# EAGLE board Mux_Board-v0-0-1 (EAGLE 5.06)
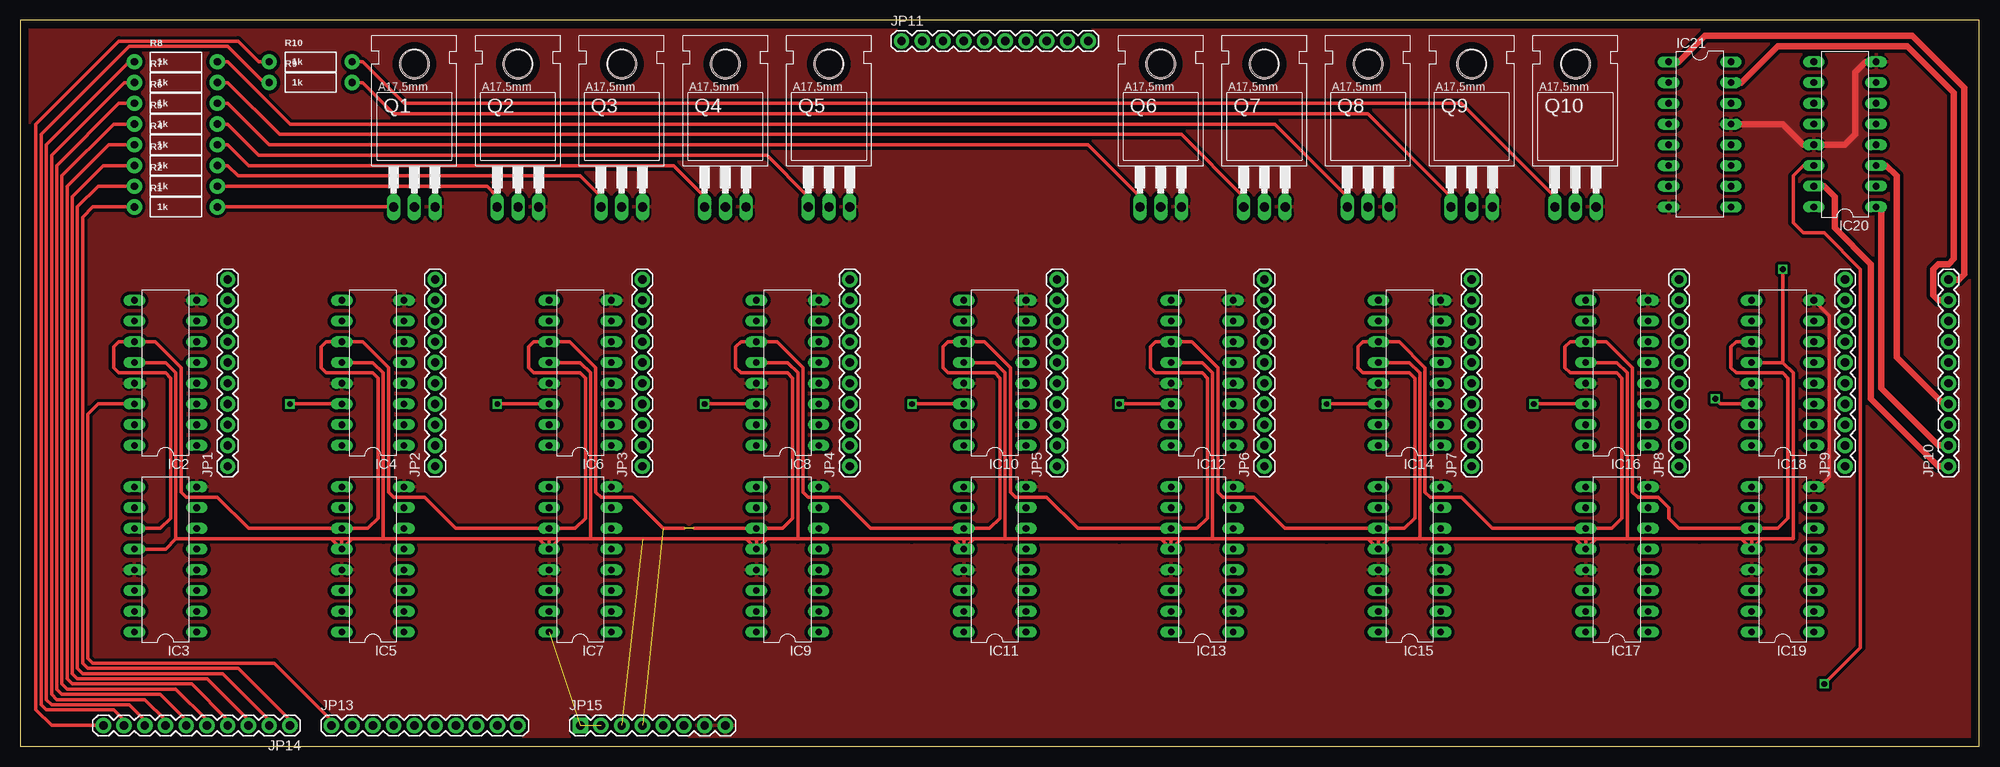
[diagram p0: board, top side]
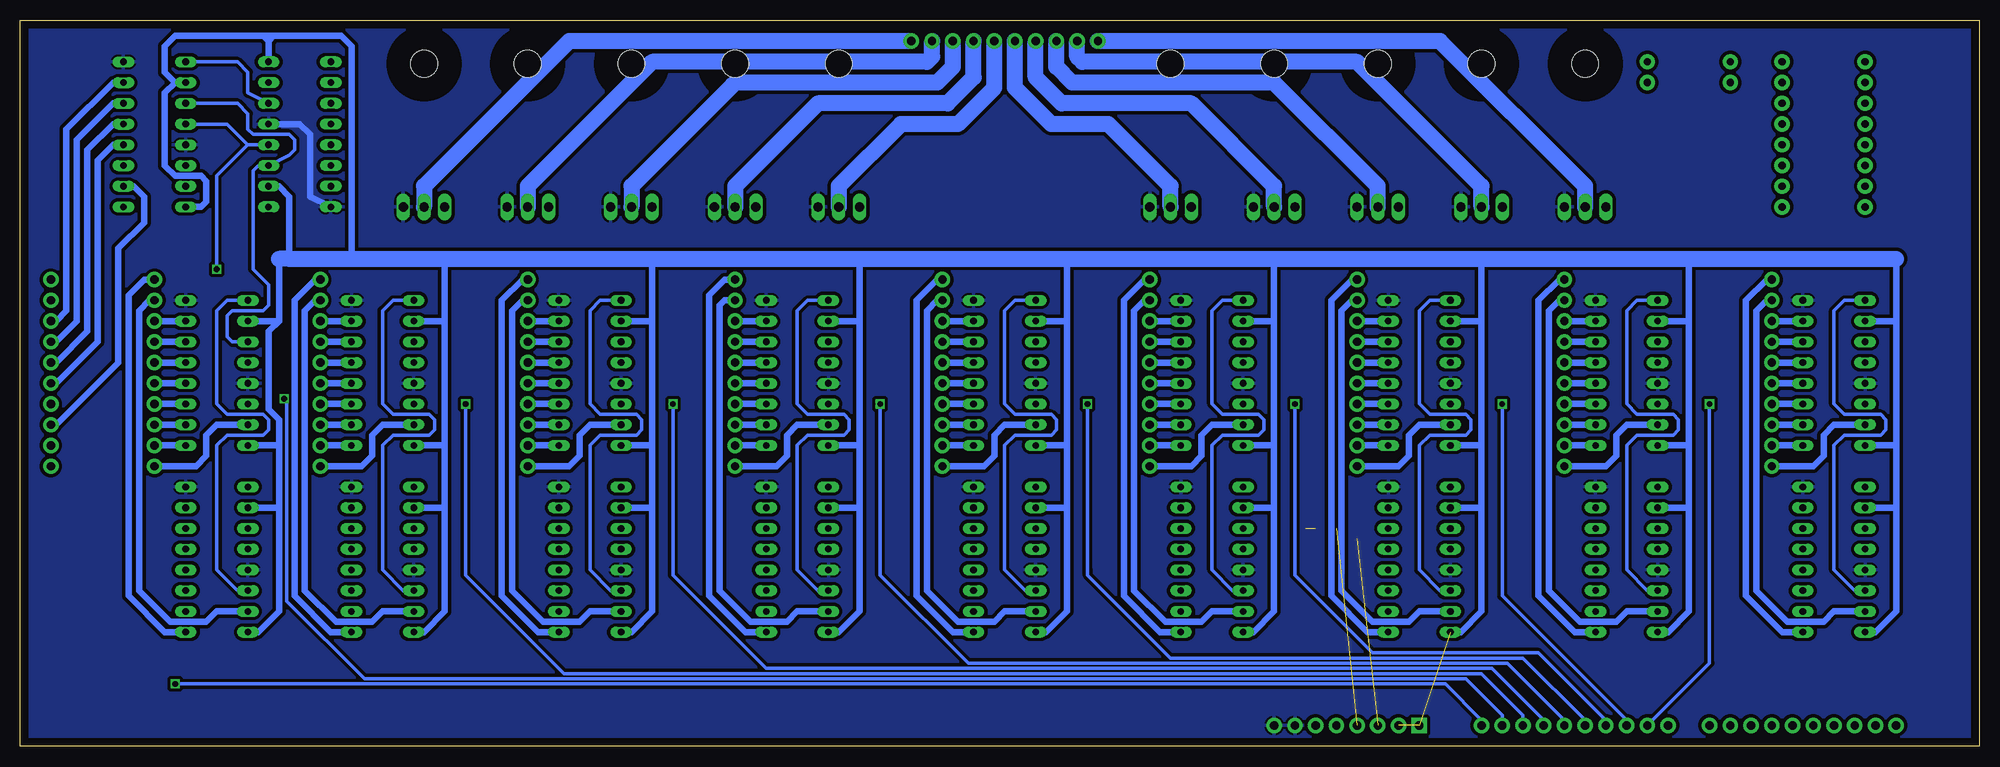
[diagram p1: board, bottom side, seen from below]

Size 239.95 x 88.89 mm. Coordinates in mm from the lower left corner, seen from the top.
Outline: 0,0 239.95,0 239.95,88.89 0,88.89 0,0
Copper layers (1*16): Top 0.035mm / dielectric 1.5mm / Bottom 0.035mm
Design rules "default": minimum track width 10mil, minimum drill 24mil, track to track 8mil, track to pad 8mil, pad to pad 8mil, via to via 8mil, smd to smd 8mil, copper to edge 40mil, drill to drill 8mil, minimum pad ring 10mil, minimum via ring 8mil, stop-mask expansion 4mil, vias tented up to drill 0mil, thermal gap 10mil

## Footprints (pad centres in the part's own frame; a part is rotated, then mirrored left to right if it is on the bottom)
DIL16 = drill 0.813 long: 1 -8.89,-3.81; 2 -6.35,-3.81; 3 -3.81,-3.81; 4 -1.27,-3.81; 5 1.27,-3.81; 6 3.81,-3.81; 7 6.35,-3.81; 8 8.89,-3.81; 9 8.89,3.81; 10 6.35,3.81; 11 3.81,3.81; 12 1.27,3.81; 13 -1.27,3.81; 14 -3.81,3.81; 15 -6.35,3.81; 16 -8.89,3.81
1X10 = drill 1.016 pad 1.88 round: 1 0,0; 2 2.54,0; 3 5.08,0; 4 7.62,0; 5 10.16,0; 6 12.7,0; 7 15.24,0; 8 17.78,0; 9 20.32,0; 10 22.86,0
1X08 = drill 1.016 pad 1.88 square: 1 0,0 | drill 1.016 pad 1.88 round: 2 2.54,0; 3 5.08,0; 4 7.62,0; 5 10.16,0; 6 12.7,0; 7 15.24,0; 8 17.78,0
TO220 = drill 1.118 long: 1 -2.54,-6.35; 2 0,-6.35; 3 2.54,-6.35 | hole 3.302: 0,11.176
AXIAL-0.4 = drill 0.9 pad 1.88 round: P$1 -5.08,0; P$2 5.08,0

## Placement (x,y rotation side)
IC2  74LS595N  [DIL16]  17.78,45.72 90 top
IC3  74LS595N  [DIL16]  17.78,22.86 90 top
IC4  74LS595N  [DIL16]  43.18,45.72 90 top
IC5  74LS595N  [DIL16]  43.18,22.86 90 top
IC6  74LS595N  [DIL16]  68.58,45.72 90 top
IC7  74LS595N  [DIL16]  68.58,22.86 90 top
IC8  74LS595N  [DIL16]  93.98,45.72 90 top
IC9  74LS595N  [DIL16]  93.98,22.86 90 top
IC10  74LS595N  [DIL16]  119.38,45.72 90 top
IC11  74LS595N  [DIL16]  119.38,22.86 90 top
IC12  74LS595N  [DIL16]  144.78,45.72 90 top
IC13  74LS595N  [DIL16]  144.78,22.86 90 top
IC14  74LS595N  [DIL16]  170.18,45.72 90 top
IC15  74LS595N  [DIL16]  170.18,22.86 90 top
IC16  74LS595N  [DIL16]  195.58,45.72 90 top
IC17  74LS595N  [DIL16]  195.58,22.86 90 top
IC18  74LS595N  [DIL16]  215.9,45.72 90 top
IC19  74LS595N  [DIL16]  215.9,22.86 90 top
IC20  74LS595N  [DIL16]  223.52,74.93 90 top
IC21  74LS595N  [DIL16]  205.74,74.93 270 top
JP1  M10"  [1X10]  25.4,34.29 90 top
JP2  M10"  [1X10]  50.8,34.29 90 top
JP3  M10"  [1X10]  76.2,34.29 90 top
JP4  M10"  [1X10]  101.6,34.29 90 top
JP5  M10"  [1X10]  127,34.29 90 top
JP6  M10"  [1X10]  152.4,34.29 90 top
JP7  M10"  [1X10]  177.8,34.29 90 top
JP8  M10"  [1X10]  203.2,34.29 90 top
JP9  M10"  [1X10]  223.52,34.29 90 top
JP10  M10"  [1X10]  236.22,34.29 90 top
JP11  M10"  [1X10]  107.95,86.36 0 top
JP13  M10"  [1X10]  38.1,2.54 0 top
JP14  M10"  [1X10]  33.02,2.54 180 top
JP15  3  [1X08]  68.58,2.54 0 top
Q1  BD243  [TO220]  48.26,72.39 0 top
Q2  BD243  [TO220]  60.96,72.39 0 top
Q3  BD243  [TO220]  73.66,72.39 0 top
Q4  BD243  [TO220]  86.36,72.39 0 top
Q5  BD243  [TO220]  99.06,72.39 0 top
Q6  BD243  [TO220]  139.7,72.39 0 top
Q7  BD243  [TO220]  152.4,72.39 0 top
Q8  BD243  [TO220]  165.1,72.39 0 top
Q9  BD243  [TO220]  177.8,72.39 0 top
Q10  BD243  [TO220]  190.5,72.39 0 top
R1  1k  [AXIAL-0.4]  19.05,66.04 0 top
R2  1k  [AXIAL-0.4]  19.05,68.58 0 top
R3  1k  [AXIAL-0.4]  19.05,71.12 0 top
R4  1k  [AXIAL-0.4]  19.05,73.66 0 top
R5  1k  [AXIAL-0.4]  19.05,76.2 0 top
R6  1k  [AXIAL-0.4]  19.05,78.74 0 top
R7  1k  [AXIAL-0.4]  19.05,81.28 0 top
R8  1k  [AXIAL-0.4]  19.05,83.82 0 top
R9  1k  [AXIAL-0.4]  35.56,81.28 0 top
R10  1k  [AXIAL-0.4]  35.56,83.82 0 top

## Library data of the parts
IC2-IC21 JP1-JP11 JP13-JP15 R1-R10 = SparkFun
Q1-Q10 = transistor-npn

## Nets
C1: IC2.14 JP13.1
C2: IC4.14 JP13.2
C3: IC6.14 JP13.3
C4: IC8.14 JP13.4
C5: IC10.14 JP13.5
C6: IC12.14 JP13.6
C7: IC14.14 JP13.7
C8: IC16.14 JP13.8
C9: IC18.14 JP13.9
C10: IC20.14 JP13.10
GND: IC2.8 IC2.13 IC3.8 IC3.13 IC4.8 IC4.13 IC5.8 IC5.13 IC6.8 IC6.13 IC7.8 IC7.13 IC8.8 IC8.13 IC9.8 IC9.13 IC10.8 IC10.13 IC11.8 IC11.13 IC12.8 IC12.13 IC13.8 IC13.13 IC14.8 IC14.13 IC15.8 IC15.13 IC16.8 IC16.13 IC17.8 IC17.13 IC18.8 IC18.13 IC19.8 IC19.13 IC20.8 IC20.13 IC21.8 IC21.13 JP15.7 JP15.8 Q1.3 Q2.3 Q3.3 Q4.3 Q5.3 Q6.3 Q7.3 Q8.3 Q9.3 Q10.3
L1: JP14.1 R1.P$1
L2: JP14.2 R2.P$1
L3: JP14.3 R3.P$1
L4: JP14.4 R4.P$1
L5: JP14.5 R5.P$1
L6: JP14.6 R6.P$1
L7: JP14.7 R7.P$1
L8: JP14.8 R8.P$1
L9: JP14.9 R9.P$1
L10: JP14.10 R10.P$1
N$3: Q1.1 R1.P$2
N$4: JP11.1 Q1.2
N$5: Q2.1 R2.P$2
N$6: IC2.9 IC3.14
N$8: IC2.15 JP1.1
N$9: IC2.1 JP1.2
N$10: IC2.2 JP1.3
N$11: IC2.3 JP1.4
N$12: IC2.4 JP1.5
N$13: IC2.5 JP1.6
N$14: IC2.6 JP1.7
N$15: IC2.7 JP1.8
N$16: IC3.15 JP1.9
N$17: IC3.1 JP1.10
N$18: Q3.1 R3.P$2
N$19: IC4.15 JP2.1
N$20: IC4.1 JP2.2
N$21: IC4.2 JP2.3
N$22: IC4.3 JP2.4
N$23: IC4.4 JP2.5
N$24: IC4.5 JP2.6
N$25: IC4.6 JP2.7
N$26: IC4.7 JP2.8
N$27: IC4.9 IC5.14
N$28: IC5.15 JP2.9
N$29: IC5.1 JP2.10
N$30: Q4.1 R4.P$2
N$31: IC7.15 JP3.9
N$32: IC6.15 JP3.1
N$33: IC6.1 JP3.2
N$34: IC6.2 JP3.3
N$35: IC6.3 JP3.4
N$36: IC6.4 JP3.5
N$37: IC6.5 JP3.6
N$38: IC6.6 JP3.7
N$39: IC6.7 JP3.8
N$40: IC7.1 JP3.10
N$41: IC6.9 IC7.14
N$42: Q5.1 R5.P$2
N$43: JP11.10 Q10.2
N$44: IC8.9 IC9.14
N$45: IC8.15 JP4.1
N$46: IC8.1 JP4.2
N$47: IC8.2 JP4.3
N$48: IC8.3 JP4.4
N$49: IC8.4 JP4.5
N$50: IC8.5 JP4.6
N$51: IC8.6 JP4.7
N$52: IC8.7 JP4.8
N$53: IC9.15 JP4.9
N$54: IC9.1 JP4.10
N$55: Q10.1 R10.P$2
N$56: IC10.15 JP5.1
N$57: IC10.1 JP5.2
N$58: IC10.2 JP5.3
N$59: IC10.3 JP5.4
N$60: IC10.4 JP5.5
N$61: IC10.5 JP5.6
N$62: IC10.6 JP5.7
N$63: IC10.7 JP5.8
N$64: IC10.9 IC11.14
N$65: IC11.15 JP5.9
N$66: IC11.1 JP5.10
N$67: Q9.1 R9.P$2
N$68: Q8.1 R8.P$2
N$69: IC12.15 JP6.1
N$70: IC12.1 JP6.2
N$71: IC12.2 JP6.3
N$72: IC12.3 JP6.4
N$73: IC12.4 JP6.5
N$74: IC12.5 JP6.6
N$75: IC12.6 JP6.7
N$76: IC12.7 JP6.8
N$77: IC12.9 IC13.14
N$78: IC13.15 JP6.9
N$79: IC13.1 JP6.10
N$80: Q7.1 R7.P$2
N$81: JP11.2 Q2.2
N$82: IC14.9 IC15.14
N$83: IC14.15 JP7.1
N$84: IC14.1 JP7.2
N$85: IC14.2 JP7.3
N$86: IC14.3 JP7.4
N$87: IC14.4 JP7.5
N$88: IC14.5 JP7.6
N$89: IC14.6 JP7.7
N$90: IC14.7 JP7.8
N$91: IC15.15 JP7.9
N$92: IC15.1 JP7.10
N$93: JP11.3 Q3.2
N$94: IC16.15 JP8.1
N$95: IC16.1 JP8.2
N$96: IC16.2 JP8.3
N$97: IC16.3 JP8.4
N$98: IC16.4 JP8.5
N$99: IC16.5 JP8.6
N$100: IC16.6 JP8.7
N$101: IC16.7 JP8.8
N$102: IC16.9 IC17.14
N$103: IC17.15 JP8.9
N$104: IC17.1 JP8.10
N$105: JP11.4 Q4.2
N$106: JP11.5 Q5.2
N$107: IC18.15 JP9.1
N$108: IC18.1 JP9.2
N$109: IC18.2 JP9.3
N$110: IC18.3 JP9.4
N$111: IC18.4 JP9.5
N$112: IC18.5 JP9.6
N$113: IC18.6 JP9.7
N$114: IC18.7 JP9.8
N$115: IC18.9 IC19.14
N$116: IC19.15 JP9.9
N$117: IC19.1 JP9.10
N$118: JP11.6 Q6.2
N$119: JP11.9 Q9.2
N$120: IC20.9 IC21.14
N$121: IC20.15 JP10.1
N$122: IC20.1 JP10.2
N$123: IC20.2 JP10.3
N$124: IC20.3 JP10.4
N$125: IC20.4 JP10.5
N$126: IC20.5 JP10.6
N$127: IC20.6 JP10.7
N$128: IC20.7 JP10.8
N$129: IC21.15 JP10.9
N$130: IC21.1 JP10.10
N$131: JP11.7 Q7.2
N$132: JP11.8 Q8.2
N$133: Q6.1 R6.P$2
RCK: IC2.12 IC3.12 IC4.12 IC5.12 IC6.12 IC7.12 IC8.12 IC9.12 IC10.12 IC11.12 IC12.12 IC13.12 IC14.12 IC15.12 IC16.12 IC17.12 IC18.12 IC19.12 IC20.12 IC21.12 JP15.3
SCK: IC2.11 IC3.11 IC4.11 IC5.11 IC6.11 IC7.11 IC8.11 IC9.11 IC10.11 IC11.11 IC12.11 IC13.11 IC14.11 IC15.11 IC16.11 IC17.11 IC18.11 IC19.11 IC20.11 IC21.11 JP15.4
VCC: IC2.10 IC2.16 IC3.10 IC3.16 IC4.10 IC4.16 IC5.10 IC5.16 IC6.10 IC6.16 IC7.10 IC7.16 IC8.10 IC8.16 IC9.10 IC9.16 IC10.10 IC10.16 IC11.10 IC11.16 IC12.10 IC12.16 IC13.10 IC13.16 IC14.10 IC14.16 IC15.10 IC15.16 IC16.10 IC16.16 IC17.10 IC17.16 IC18.10 IC18.16 IC19.10 IC19.16 IC20.10 IC20.16 IC21.10 IC21.16 JP15.1 JP15.2

## Tracks (layer width: path | path; a pad name or v marks a point on that pad's centre or on a via)
C1
  Top 0.406: IC2.14 9.53,41.91 8.26,40.64 8.26,10.79 8.89,10.16 31.11,10.16 38.1,3.17 JP13.1
C2  (via drill 0.7)
  Top 0.406: v33.02,41.91 IC4.14
  Bottom 0.406: v33.02,41.91 33.02,10.16 JP13.2
C3  (via drill 0.7)
  Top 0.406: v58.42,41.91 IC6.14
  Bottom 0.406: v58.42,41.91 58.42,18.41 43.18,3.17 JP13.3
C4  (via drill 0.7)
  Top 0.406: v83.82,41.91 IC8.14
  Bottom 0.406: v83.82,41.91 83.82,20.95 74.3,11.43 53.98,11.43 45.72,3.17 JP13.4
C5  (via drill 0.7)
  Top 0.406: v109.22,41.91 IC10.14
  Bottom 0.406: JP13.5 48.26,3.17 55.88,10.79 99.06,10.79 109.22,20.95 109.22,21.59 v109.22,41.91
C6  (via drill 0.7)
  Top 0.406: v134.62,41.91 IC12.14
  Bottom 0.406: v134.62,41.91 134.62,20.95 123.83,10.16 57.78,10.16 50.8,3.17 JP13.6
C7  (via drill 0.7)
  Top 0.406: v160.02,41.91 IC14.14
  Bottom 0.406: v160.02,41.91 160.02,20.95 148.59,9.53 59.69,9.53 53.34,3.17 JP13.7
C8  (via drill 0.7)
  Top 0.406: v185.42,41.91 IC16.14
  Bottom 0.406: v185.42,41.91 185.42,20.95 173.35,8.89 60.96,8.89 55.88,3.81 JP13.8
C9  (via drill 0.7)
  Top 0.406: IC18.14 208.28,41.91 v207.65,42.55
  Bottom 0.406: v207.65,42.55 207.33,42.23 207.33,17.78 197.8,8.25 62.87,8.25 58.42,3.81 JP13.9
C10  (via drill 0.7)
  Top 0.406: IC20.14 218.44,71.12 217.17,69.85 217.17,64.13 218.44,62.87 220.98,62.87 225.43,58.42 225.43,12.06 v220.98,7.62
  Bottom 0.406: v220.98,7.62 65.41,7.62 60.96,3.17 JP13.10
GND
  Top 0.406: IC19.8 220.34,31.75 221.62,33.02 221.62,52.7 IC18.8
  Top 0.813: IC20.8 226.06,83.82 224.79,82.55 224.79,74.93 223.52,73.66 IC20.13 218.44,73.66 215.9,76.2 IC21.13
  Bottom 0.813: IC21.13 205.74,76.2 204.47,74.93 204.47,67.31 IC21.8
  pour Top (isolate 0.406): 0,0 0,88.9 240.03,88.9 240.03,0
  pour Bottom (isolate 0.406, rank 2): 0,0 0,88.9 240.03,88.9 240.03,0
L1
  Top 0.406: R1.P$1 8.89,66.04 7.62,64.77 7.62,10.16 8.26,9.53 26.67,9.53 33.02,3.17 JP14.1
L2
  Top 0.406: R2.P$1 9.53,68.58 6.99,66.04 6.99,9.53 7.62,8.89 24.77,8.89 30.48,3.17 JP14.2
L3
  Top 0.406: R3.P$1 10.16,71.12 6.35,67.31 6.35,8.89 6.99,8.25 22.86,8.25 27.94,3.17 JP14.3
L4
  Top 0.406: R4.P$1 10.79,73.66 5.71,68.58 5.71,8.25 6.35,7.62 20.95,7.62 25.4,3.17 JP14.4
L5
  Top 0.406: R5.P$1 11.43,76.2 5.08,69.85 5.08,7.62 5.71,6.98 19.05,6.98 22.86,3.17 JP14.5
L6
  Top 0.406: R6.P$1 12.06,78.74 4.45,71.12 4.45,6.98 5.08,6.35 17.14,6.35 20.32,3.17 JP14.6
L7
  Top 0.406: R7.P$1 12.7,81.28 3.81,72.39 3.81,6.35 4.45,5.71 15.24,5.71 17.78,3.17 JP14.7
L8
  Top 0.406: R8.P$1 13.34,83.82 3.17,73.66 3.17,5.71 3.81,5.08 13.34,5.08 15.24,3.17 JP14.8
L9
  Top 0.406: R9.P$1 29.84,81.28 25.4,85.72 13.34,85.72 2.54,74.93 2.54,5.08 3.17,4.44 11.43,4.44 12.7,3.17 JP14.9
L10
  Top 0.406: R10.P$1 29.21,83.82 26.67,86.36 12.06,86.36 1.91,76.2 1.91,4.44 3.81,2.54 JP14.10
N$3
  Top 0.406: R1.P$2 Q1.1
N$4
  Bottom 1.93: Q1.2 48.26,68.58 66.04,86.36 JP11.1
N$5
  Top 0.406: R2.P$2 57.15,68.58 58.42,67.31 Q2.1
N$6
  Bottom 0.406: IC2.9 16.51,54.61 17.78,53.34 17.78,41.91 16.51,40.64 12.06,40.64 11.43,40 11.43,38.73 12.06,38.1 16.51,38.1 17.78,36.83 17.78,21.59 15.24,19.05 IC3.14
N$8
  Bottom 0.813: IC2.15 17.78,39.37 19.05,38.1 19.05,35.56 20.32,34.29 JP1.1
N$9
  Bottom 0.813: IC2.1 JP1.2
N$10
  Bottom 0.813: IC2.2 JP1.3
N$11
  Bottom 0.813: IC2.3 JP1.4
N$12
  Bottom 0.813: IC2.4 JP1.5
N$13
  Bottom 0.813: IC2.5 JP1.6
N$14
  Bottom 0.813: IC2.6 JP1.7
N$15
  Bottom 0.813: IC2.7 JP1.8
N$16
  Bottom 0.813: IC3.15 17.78,16.51 19.05,15.24 23.5,15.24 27.3,19.05 27.3,53.34 26.04,54.61 JP1.9
N$17
  Bottom 0.813: JP1.10 26.04,57.15 28.57,54.61 28.57,18.41 24.13,13.97 IC3.1
N$18
  Top 0.406: R3.P$2 25.4,71.12 26.67,69.85 68.58,69.85 71.12,67.31 Q3.1
N$19
  Bottom 0.813: IC4.15 43.18,39.37 44.45,38.1 44.45,35.56 45.72,34.29 JP2.1
N$20
  Bottom 0.813: IC4.1 JP2.2
N$21
  Bottom 0.813: IC4.2 JP2.3
N$22
  Bottom 0.813: IC4.3 JP2.4
N$23
  Bottom 0.813: IC4.4 JP2.5
N$24
  Bottom 0.813: IC4.5 JP2.6
N$25
  Bottom 0.813: IC4.6 JP2.7
N$26
  Bottom 0.813: IC4.7 JP2.8
N$27
  Bottom 0.406: IC4.9 41.91,54.61 43.18,53.34 43.18,41.91 41.91,40.64 37.47,40.64 36.83,40 36.83,38.73 37.47,38.1 41.91,38.1 43.18,36.83 43.18,21.59 40.64,19.05 IC5.14
N$28
  Bottom 0.813: IC5.15 43.18,16.51 44.45,15.24 48.9,15.24 52.7,19.05 52.7,53.34 51.44,54.61 JP2.9
N$29
  Bottom 0.813: IC5.1 49.53,13.97 53.98,18.41 53.98,54.61 51.44,57.15 JP2.10
N$30
  Top 0.406: R4.P$2 25.4,73.66 27.94,71.12 80.01,71.12 83.82,67.31 Q4.1
N$31
  Bottom 0.813: IC7.15 68.58,16.51 69.85,15.24 74.3,15.24 78.11,19.05 78.11,53.34 76.83,54.61 JP3.9
N$32
  Bottom 0.813: IC6.15 68.58,39.37 69.85,38.1 69.85,35.56 71.12,34.29 JP3.1
N$33
  Bottom 0.813: IC6.1 JP3.2
N$34
  Bottom 0.813: IC6.2 JP3.3
N$35
  Bottom 0.813: IC6.3 JP3.4
N$36
  Bottom 0.813: IC6.4 JP3.5
N$37
  Bottom 0.813: IC6.5 JP3.6
N$38
  Bottom 0.813: IC6.6 JP3.7
N$39
  Bottom 0.813: IC6.7 JP3.8
N$40
  Bottom 0.813: JP3.10 76.83,57.15 79.38,54.61 79.38,18.41 74.93,13.97 IC7.1
N$41
  Bottom 0.406: IC6.9 67.31,54.61 68.58,53.34 68.58,41.91 67.31,40.64 62.87,40.64 62.23,40 62.23,38.73 62.87,38.1 67.31,38.1 68.58,36.83 68.58,21.59 66.04,19.05 IC7.14
N$42
  Top 0.406: R5.P$2 25.4,76.2 29.21,72.39 91.44,72.39 96.52,67.31 Q5.1
N$43
  Bottom 1.93: Q10.2 190.5,68.58 172.72,86.36 JP11.10
N$44
  Bottom 0.406: IC8.9 92.71,54.61 93.98,53.34 93.98,41.91 92.71,40.64 88.27,40.64 87.63,40 87.63,38.73 88.27,38.1 92.71,38.1 93.98,36.83 93.98,21.59 91.44,19.05 IC9.14
N$45
  Bottom 0.813: IC8.15 93.98,39.37 95.25,38.1 95.25,35.56 96.52,34.29 JP4.1
N$46
  Bottom 0.813: IC8.1 JP4.2
N$47
  Bottom 0.813: IC8.2 JP4.3
N$48
  Bottom 0.813: IC8.3 JP4.4
N$49
  Bottom 0.813: IC8.4 JP4.5
N$50
  Bottom 0.813: IC8.5 JP4.6
N$51
  Bottom 0.813: IC8.6 JP4.7
N$52
  Bottom 0.813: IC8.7 JP4.8
N$53
  Bottom 0.813: IC9.15 93.98,16.51 95.25,15.24 99.69,15.24 103.5,19.05 103.5,53.34 102.23,54.61 JP4.9
N$54
  Bottom 0.813: 100.33,13.97 IC9.1 100.33,13.97 | 100.33,13.97 104.78,18.41 | 104.78,18.41 104.78,54.61 | 104.78,54.61 102.23,57.15 | 102.23,57.15 JP4.10 | 104.78,18.41 104.78,54.61 | 104.78,54.61 102.23,57.15
N$55
  Top 0.406: R10.P$2 41.91,83.82 46.99,78.74 176.53,78.74 187.96,67.31 Q10.1
N$56
  Bottom 0.813: IC10.15 119.38,39.37 120.65,38.1 120.65,35.56 121.92,34.29 JP5.1
N$57
  Bottom 0.813: IC10.1 JP5.2
N$58
  Bottom 0.813: IC10.2 JP5.3
N$59
  Bottom 0.813: IC10.3 JP5.4
N$60
  Bottom 0.813: IC10.4 JP5.5
N$61
  Bottom 0.813: IC10.5 JP5.6
N$62
  Bottom 0.813: IC10.6 JP5.7
N$63
  Bottom 0.813: IC10.7 JP5.8
N$64
  Bottom 0.406: IC10.9 118.11,54.61 119.38,53.34 119.38,41.91 118.11,40.64 113.67,40.64 113.03,40 113.03,38.73 113.67,38.1 118.11,38.1 119.38,36.83 119.38,21.59 116.84,19.05 IC11.14
N$65
  Bottom 0.813: IC11.15 119.38,16.51 120.65,15.24 125.09,15.24 128.91,19.05 128.91,53.34 127.64,54.61 JP5.9
N$66
  Bottom 0.813: JP5.10 127.64,57.15 130.18,54.61 130.18,18.41 125.73,13.97 IC11.1
N$67
  Top 0.406: R9.P$2 41.91,81.28 45.72,77.47 165.1,77.47 175.26,67.31 Q9.1
N$68
  Top 0.406: R8.P$2 25.4,83.82 33.02,76.2 153.67,76.2 162.56,67.31 Q8.1
N$69
  Bottom 0.813: IC12.15 144.78,39.37 146.05,38.1 146.05,35.56 147.32,34.29 JP6.1
N$70
  Bottom 0.813: IC12.1 JP6.2
N$71
  Bottom 0.813: IC12.2 JP6.3
N$72
  Bottom 0.813: IC12.3 JP6.4
N$73
  Bottom 0.813: IC12.4 JP6.5
N$74
  Bottom 0.813: IC12.5 JP6.6
N$75
  Bottom 0.813: IC12.6 JP6.7
N$76
  Bottom 0.813: IC12.7 JP6.8
N$77
  Bottom 0.406: IC12.9 143.51,54.61 144.78,53.34 144.78,41.91 143.51,40.64 139.06,40.64 138.43,40 138.43,38.73 139.06,38.1 143.51,38.1 144.78,36.83 144.78,21.59 142.24,19.05 IC13.14
N$78
  Bottom 0.813: IC13.15 144.78,16.51 146.05,15.24 150.5,15.24 154.31,19.05 154.31,53.98 153.67,54.61 JP6.9
N$79
  Bottom 0.813: JP6.10 153.67,57.15 155.57,55.24 155.57,18.41 151.13,13.97 IC13.1
N$80
  Top 0.406: R7.P$2 25.4,81.28 31.75,74.93 142.24,74.93 149.86,67.31 Q7.1
N$81
  Bottom 1.93: JP11.2 110.49,84.46 109.86,83.82 76.2,83.82 60.96,68.58 Q2.2
N$82
  Bottom 0.406: IC14.9 168.91,54.61 170.18,53.34 170.18,41.91 168.91,40.64 164.47,40.64 163.83,40 163.83,38.73 164.47,38.1 168.91,38.1 170.18,36.83 170.18,21.59 167.64,19.05 IC15.14
N$83
  Bottom 0.813: IC14.15 170.18,39.37 171.45,38.1 171.45,35.56 172.72,34.29 JP7.1
N$84
  Bottom 0.813: IC14.1 JP7.2
N$85
  Bottom 0.813: IC14.2 JP7.3
N$86
  Bottom 0.813: IC14.3 JP7.4
N$87
  Bottom 0.813: IC14.4 JP7.5
N$88
  Bottom 0.813: IC14.5 JP7.6
N$89
  Bottom 0.813: IC14.6 JP7.7
N$90
  Bottom 0.813: IC14.7 JP7.8
N$91
  Bottom 0.813: IC15.15 170.18,16.51 171.45,15.24 175.9,15.24 179.71,19.05 179.71,53.34 178.44,54.61 JP7.9
N$92
  Bottom 0.813: IC15.1 176.53,13.97 180.97,18.41 180.97,54.61 178.44,57.15 JP7.10
N$93
  Bottom 1.93: JP11.3 113.03,83.19 111.12,81.28 86.36,81.28 73.66,68.58 Q3.2
N$94
  Bottom 0.813: IC16.15 195.58,39.37 196.85,38.1 196.85,35.56 198.12,34.29 JP8.1
N$95
  Bottom 0.813: IC16.1 JP8.2
N$96
  Bottom 0.813: IC16.2 JP8.3
N$97
  Bottom 0.813: IC16.3 JP8.4
N$98
  Bottom 0.813: IC16.4 JP8.5
N$99
  Bottom 0.813: IC16.5 JP8.6
N$100
  Bottom 0.813: IC16.6 JP8.7
N$101
  Bottom 0.813: IC16.7 JP8.8
N$102
  Bottom 0.406: IC16.9 194.31,54.61 195.58,53.34 195.58,41.91 194.31,40.64 189.87,40.64 189.23,40 189.23,38.73 189.87,38.1 194.31,38.1 195.58,36.83 195.58,21.59 193.04,19.05 IC17.14
N$103
  Bottom 0.813: IC17.15 195.58,16.51 196.85,15.24 201.29,15.24 205.1,19.05 205.1,53.34 203.84,54.61 JP8.9
N$104
  Bottom 0.813: JP8.10 203.84,57.15 206.38,54.61 206.38,18.41 201.93,13.97 IC17.1
N$105
  Bottom 1.93: JP11.4 115.57,81.91 112.39,78.74 96.52,78.74 86.36,68.58 Q4.2
N$106
  Bottom 1.93: Q5.2 99.06,68.58 106.68,76.2 113.67,76.2 118.11,80.65 JP11.5
N$107
  Bottom 0.813: IC18.15 215.9,39.37 217.17,38.1 217.17,35.56 218.44,34.29 JP9.1
N$108
  Bottom 0.813: IC18.1 JP9.2
N$109
  Bottom 0.813: IC18.2 JP9.3
N$110
  Bottom 0.813: JP9.4 IC18.3
N$111
  Bottom 0.813: JP9.5 IC18.4
N$112
  Bottom 0.813: IC18.5 JP9.6
N$113
  Bottom 0.813: IC18.6 JP9.7
N$114
  Bottom 0.813: IC18.7 JP9.8
N$115
  Bottom 0.406: IC18.9 214.63,54.61 215.9,53.34 215.9,41.91 214.63,40.64 210.19,40.64 209.55,40 209.55,38.73 210.19,38.1 214.63,38.1 215.9,36.83 215.9,21.59 213.36,19.05 IC19.14
N$116
  Bottom 0.813: IC19.15 215.9,16.51 217.17,15.24 221.62,15.24 225.43,19.05 225.43,53.34 224.16,54.61 JP9.9
N$117
  Bottom 0.813: JP9.10 224.79,57.15 226.69,55.24 226.69,18.41 222.25,13.97 IC19.1
N$118
  Bottom 1.93: Q6.2 139.7,68.58 132.08,76.2 125.09,76.2 120.65,80.65 JP11.6
N$119
  Bottom 1.93: Q9.2 177.8,68.58 162.56,83.82 128.91,83.82 128.27,84.46 JP11.9
N$120
  Bottom 0.406: IC21.14 212.09,80.01 212.09,82.55 213.36,83.82 IC20.9
N$121
  Top 0.813: IC20.15 220.98,68.58 222.25,67.31 222.25,63.5 226.69,59.05 226.69,42.55 234.95,34.29 JP10.1
N$122
  Top 0.813: IC20.1 227.97,66.04 227.97,43.81 234.95,36.83 JP10.2
N$123
  Bottom 0.813: IC20.2 226.06,68.58 224.79,67.31 224.79,64.13 227.97,60.96 227.97,46.99 235.59,39.37 JP10.3
N$124
  Top 0.813: IC20.3 228.6,71.12 229.87,69.85 229.87,47.62 235.59,41.91 JP10.4
N$125
  Bottom 0.813: IC20.4 228.6,73.66 230.5,71.75 230.5,49.53 235.59,44.45 JP10.5
N$126
  Bottom 0.813: IC20.5 228.6,76.2 231.78,73.03 231.78,50.8 235.59,46.99 JP10.6
N$127
  Bottom 0.813: IC20.6 228.6,78.74 233.04,74.3 233.04,52.07 235.59,49.53 JP10.7
N$128
  Bottom 0.813: IC20.7 228.6,81.28 234.31,75.56 234.31,53.34 235.59,52.07 JP10.8
N$129
  Top 0.813: JP10.9 234.95,54.61 234.31,55.24 234.31,58.42 234.95,59.05 236.22,59.05 236.85,59.69 236.85,80.01 231.14,85.72 215.26,85.72 210.82,81.28 IC21.15
N$130
  Top 0.813: JP10.10 237.49,57.15 238.12,57.78 238.12,80.65 231.78,87 206.38,87 203.2,83.82 IC21.1
N$131
  Bottom 1.93: Q7.2 152.4,68.58 142.24,78.74 126.36,78.74 123.19,81.91 JP11.7
N$132
  Bottom 1.93: Q8.2 165.1,68.58 152.72,80.96 152.4,81.28 127.64,81.28 125.73,83.19 JP11.8
N$133
  Top 0.406: R6.P$2 25.4,78.74 30.48,73.66 130.81,73.66 137.16,67.31 Q6.1
RCK  (via drill 0.7)  (1 unrouted)
  Top 0.406: IC12.12 144.78,46.99 146.05,45.72 146.05,25.4 160.02,25.4 | 69.85,25.4 69.85,45.72 68.58,46.99 IC6.12 | 120.65,25.4 120.65,45.72 119.38,46.99 IC10.12 | IC3.12 17.78,24.13 19.05,25.4 | 19.05,25.4 19.05,45.72 17.78,46.99 IC2.12 | 44.45,25.4 44.45,45.72 43.18,46.99 IC4.12 | IC8.12 93.98,46.99 95.25,45.72 95.25,25.4 109.22,25.4 | 171.45,25.4 171.45,45.72 170.18,46.99 IC14.12 | 196.85,25.4 196.85,45.72 195.58,46.99 IC16.12 | 217.17,25.4 217.17,45.72 215.9,46.99 | 215.9,46.99 IC18.12 | v215.9,58.42 215.9,46.99 | 40.64,25.4 39.37,25.4 | 39.37,25.4 38.1,25.4 | 38.1,25.4 19.05,25.4 | 44.45,25.4 40.64,25.4 | 40.64,25.4 IC5.12 | IC5.12 38.1,25.4 | 39.37,25.4 IC5.12 | 63.5,25.4 44.45,25.4 | 64.77,25.4 63.5,25.4 | 69.85,25.4 64.77,25.4 | 69.85,25.4 66.04,25.4 IC7.12 | IC7.12 63.5,25.4 | 64.77,25.4 IC7.12 | 217.17,25.4 212.09,25.4 | 210.82,25.4 205.74,25.4 | 205.74,25.4 196.85,25.4 | 196.85,25.4 191.77,25.4 | 171.45,25.4 166.37,25.4 | 165.1,25.4 160.02,25.4 | 160.02,25.4 142.24,25.4 | 142.24,25.4 140.97,25.4 | 139.7,25.4 134.62,25.4 | 134.62,25.4 120.65,25.4 | 116.84,25.4 115.57,25.4 | 114.3,25.4 109.22,25.4 | 109.22,25.4 91.44,25.4 | 91.44,25.4 90.17,25.4 | 88.9,25.4 76.2,25.4 69.85,25.4 | 217.17,25.4 213.36,25.4 IC19.12 | IC19.12 210.82,25.4 | 212.09,25.4 210.82,25.4 | 212.09,25.4 IC19.12 | 212.09,25.4 205.74,25.4 | 196.85,25.4 193.04,25.4 IC17.12 | 191.77,25.4 IC17.12 | 191.77,25.4 190.5,25.4 | IC17.12 190.5,25.4 | 190.5,25.4 171.45,25.4 | 171.45,25.4 167.64,25.4 IC15.12 | IC15.12 165.1,25.4 | 166.37,25.4 165.1,25.4 | 166.37,25.4 IC15.12 | 166.37,25.4 160.02,25.4 | 142.24,25.4 IC13.12 | IC13.12 139.7,25.4 | 140.97,25.4 139.7,25.4 | 140.97,25.4 IC13.12 | 140.97,25.4 134.62,25.4
  Top 0.406: 120.65,25.4 116.84,25.4 | 116.84,25.4 IC11.12 | IC11.12 114.3,25.4 | 115.57,25.4 114.3,25.4 | 115.57,25.4 IC11.12 | 115.57,25.4 109.22,25.4 | 91.44,25.4 IC9.12 | IC9.12 88.9,25.4 | 90.17,25.4 88.9,25.4 | 90.17,25.4 IC9.12
  Bottom 0.406: IC20.12 214.63,76.2 212.09,73.66 | 212.09,73.66 IC21.12 | 212.09,73.66 215.9,69.85 v215.9,58.42
SCK  (2 unrouted)
  Top 0.406: IC3.11 17.14,26.67 18.41,27.94 18.41,45.09 17.78,45.72 12.06,45.72 11.43,46.35 11.43,48.9 12.06,49.53 IC2.11 16.51,49.53 19.68,46.35 19.68,31.11 20.32,30.48 24.13,30.48 27.94,26.67 IC5.11 42.55,26.67 43.81,27.94 43.81,45.09 43.18,45.72 37.47,45.72 36.83,46.35 36.83,48.9 37.47,49.53 IC4.11 41.91,49.53 45.09,46.35 45.09,31.11 45.72,30.48 49.53,30.48 53.34,26.67 IC7.11 67.94,26.67 69.22,27.94 69.22,45.09 68.58,45.72 62.87,45.72 62.23,46.35 62.23,48.9 62.87,49.53 IC6.11 67.31,49.53 70.48,46.35 70.48,31.11 71.12,30.48 74.93,30.48 78.74,26.67 81.28,26.67 | IC18.11 210.19,49.53 209.55,48.9 209.55,46.35 210.19,45.72 215.9,45.72 216.53,45.09 216.53,27.94 215.26,26.67 IC19.11 203.2,26.67 201.93,27.94 201.93,29.21 200.66,30.48 198.12,30.48 197.49,31.11 197.49,46.35 194.31,49.53 IC16.11 189.87,49.53 189.23,48.9 189.23,46.35 189.87,45.72 195.58,45.72 196.22,45.09 196.22,27.94 194.94,26.67 IC17.11 180.34,26.67 176.53,30.48 172.72,30.48 172.09,31.11 172.09,46.35 168.91,49.53 IC14.11 164.47,49.53 163.83,48.9 163.83,46.35 164.47,45.72 170.18,45.72 170.81,45.09 170.81,27.94 169.54,26.67 IC15.11 154.94,26.67 151.13,30.48 147.32,30.48 146.69,31.11 146.69,46.35 143.51,49.53 IC12.11 139.06,49.53 138.43,48.9 138.43,46.35 139.06,45.72 144.78,45.72 145.41,45.09 145.41,27.94 144.15,26.67 IC13.11 129.54,26.67 125.73,30.48 121.92,30.48 121.28,31.11 121.28,46.35 118.11,49.53 IC10.11 113.67,49.53 113.03,48.9 113.03,46.35 113.67,45.72 119.38,45.72 120.02,45.09 120.02,27.94 118.75,26.67 IC11.11 104.14,26.67 100.33,30.48 96.52,30.48 95.89,31.11 95.89,46.35 92.71,49.53 IC8.11 88.27,49.53 87.63,48.9 87.63,46.35 88.27,45.72 93.98,45.72 94.61,45.09 94.61,27.94 93.34,26.67 IC9.11 82.55,26.67
  Bottom 0.406: IC20.11 213.36,78.74 212.09,77.47 212.09,75.56 211.46,74.93 207.01,74.93 206.38,74.3 206.38,73.03 207.01,72.39 IC21.11 210.82,71.12 211.46,70.48 211.46,58.42 209.55,56.52 209.55,53.98 210.19,53.34 214,53.34 214.63,52.7 214.63,50.16 214,49.53 IC18.11
VCC  (2 unrouted)
  Bottom 0.813: IC13.16 139.7,13.97 137.16,16.51 137.16,29.21 | 137.16,36.83 137.16,29.21 | 137.16,52.07 137.16,36.83 | 137.16,59.69 137.16,52.07 | 137.16,52.07 IC12.10 | 137.16,36.83 IC12.16 | 137.16,29.21 IC13.10 | 10.16,52.07 IC2.10 | 10.16,52.07 10.16,36.83 | 10.16,36.83 IC2.16 | 10.16,29.21 IC3.10 | IC3.16 12.7,13.97 10.16,16.51 10.16,29.21 | 10.16,59.69 10.16,52.07 | 10.16,36.83 10.16,29.21 | 35.56,52.07 IC4.10 | 35.56,52.07 35.56,36.83 | 35.56,36.83 IC4.16 | 35.56,29.21 IC5.10 | IC5.16 38.1,13.97 35.56,16.51 35.56,29.21 | 35.56,59.69 35.56,52.07 | 35.56,36.83 35.56,29.21 | 60.96,52.07 IC6.10 | 60.96,52.07 60.96,36.83 | 60.96,36.83 IC6.16 | 60.96,29.21 IC7.10 | IC7.16 63.5,13.97 60.96,16.51 60.96,29.21 | 60.96,59.69 60.96,52.07 | 60.96,36.83 60.96,29.21 | 86.36,52.07 IC8.10 | 86.36,52.07 86.36,36.83 | 86.36,36.83 IC8.16 | 86.36,29.21 IC9.10 | IC9.16 88.9,13.97 86.36,16.51 86.36,29.21 | 86.36,59.69 86.36,52.07 | 86.36,36.83 86.36,29.21 | 111.76,52.07 IC10.10 | 111.76,52.07 111.76,36.83 | 111.76,36.83 IC10.16 | 111.76,29.21 IC11.10 | IC11.16 114.3,13.97 111.76,16.51 111.76,29.21 | 111.76,59.69 111.76,52.07 | 111.76,36.83 111.76,29.21 | 162.56,52.07 IC14.10 | 162.56,52.07 162.56,36.83 | 162.56,36.83 IC14.16 | 162.56,29.21 IC15.10 | IC15.16 165.1,13.97 162.56,16.51 162.56,29.21 | 162.56,59.69 162.56,52.07 | 162.56,36.83 162.56,29.21 | 187.96,52.07 IC16.10 | 187.96,52.07 187.96,36.83 | 187.96,36.83 IC16.16 | 187.96,29.21 IC17.10 | IC17.16 190.5,13.97 187.96,16.51 187.96,29.21 | 187.96,59.69 187.96,52.07 | 187.96,36.83 187.96,29.21 | IC19.16 210.82,13.97 208.28,16.51 208.28,29.21 | 208.28,59.69 208.28,52.07 | 208.28,36.83 208.28,29.21 | 208.28,29.21 IC19.10 | 208.28,36.83 IC18.16
  Bottom 0.813: 208.28,52.07 IC18.10 | 220.98,81.28 222.25,82.55 222.25,85.72 220.98,87 210.82,87 | 220.98,81.28 IC20.10 | 220.98,81.28 222.25,80.01 222.25,71.12 220.98,69.85 217.81,69.85 217.17,69.22 217.17,66.67 217.81,66.04 IC20.16 | IC21.10 208.28,68.58 207.01,67.31 207.01,59.69 | 199.39,59.69 199.39,85.72 200.66,87 208.91,87 | 208.91,87 209.55,86.36 | 209.55,86.36 IC21.16 | 209.55,86.36 210.19,87 210.82,87 | 208.91,87 210.82,87 | 208.28,36.83 208.28,40 209.55,41.27 209.55,50.8 208.28,52.07
  Bottom 1.93: 10.16,59.69 35.56,59.69 60.96,59.69 86.36,59.69 111.76,59.69 137.16,59.69 162.56,59.69 187.96,59.69 199.39,59.69 207.01,59.69 208.28,59.69